# EAGLE board tivac-shield-power-board (EAGLE 7.1.0)
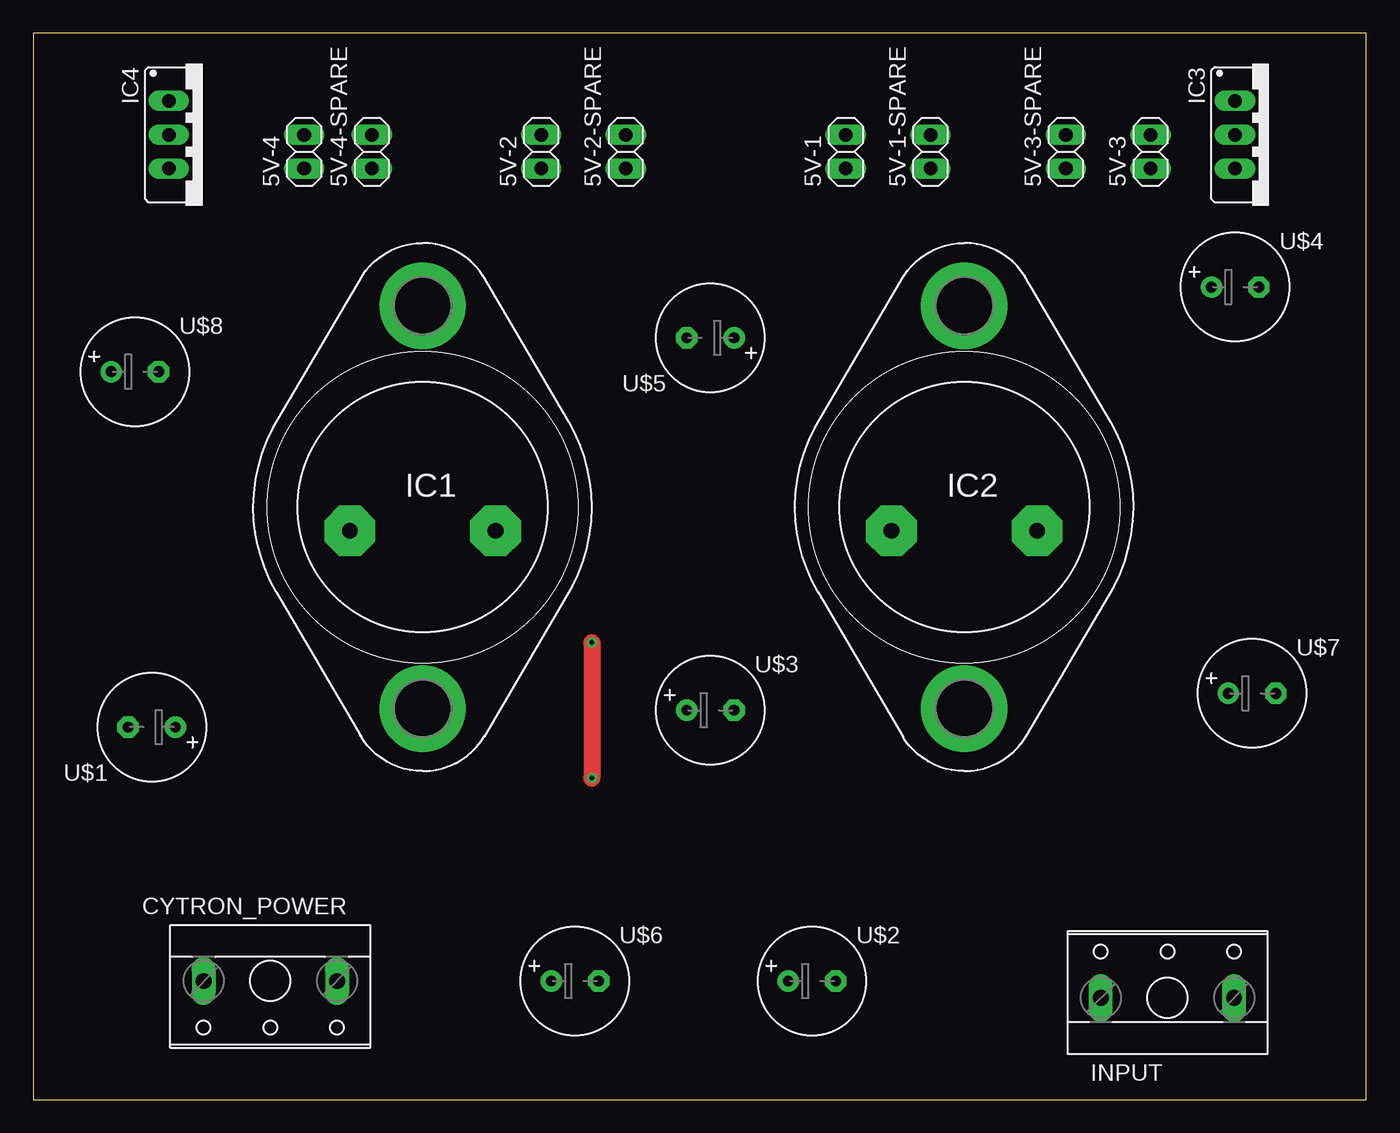
[diagram p0: board, top side]
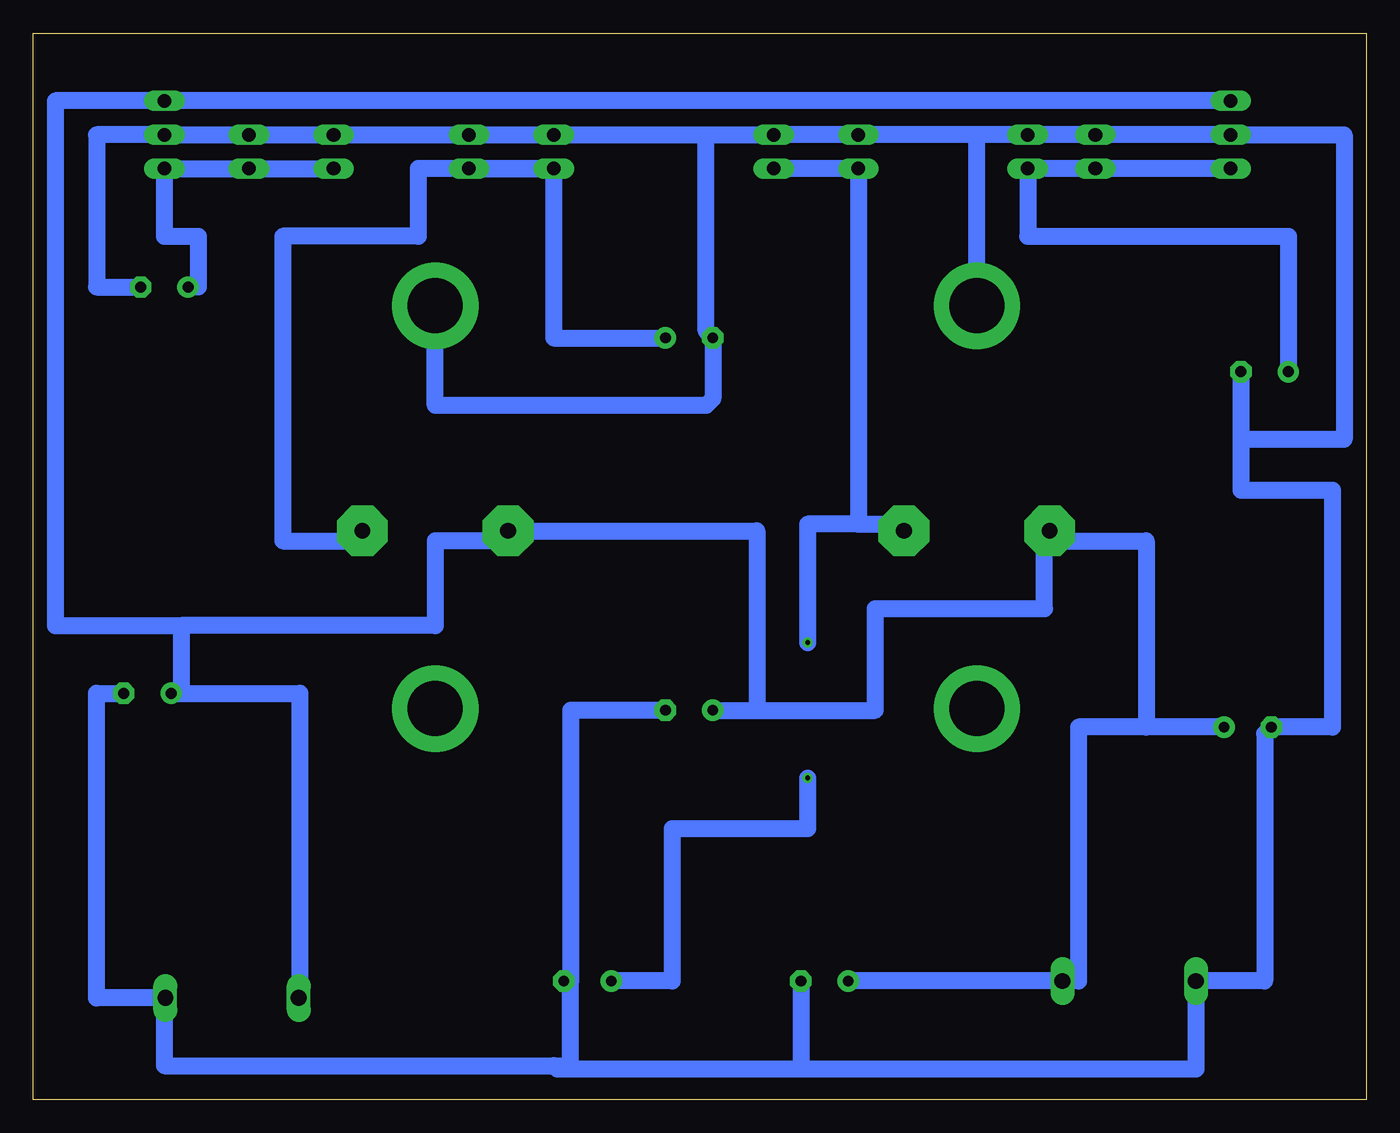
[diagram p1: board, bottom side, seen from below]

Size 100 x 80 mm. Coordinates in mm from the lower left corner, seen from the top.
Outline: 0,0 100,0 100,80 0,80 0,0
Copper layers (1*16): Top 0.035mm / dielectric 1.5mm / Bottom 0.035mm
Design rules "default": minimum track width 6mil, minimum drill 0.35mm, track to track 6mil, track to pad 6mil, pad to pad 6mil, via to via 6mil, smd to smd 6mil, copper to edge 40mil, drill to drill 6mil, minimum pad ring 10mil, minimum via ring 8mil, stop-mask expansion 4mil, vias tented up to drill 0mil, thermal gap 10mil

## Footprints (pad centres in the part's own frame; a part is rotated, then mirrored left to right if it is on the bottom)
1X02 = drill 1.016 long: 1 -1.27,0; 2 1.27,0
W237-113 = drill 1.194 long: 1 -5,-1.27; 2 5,-1.27
TO3-79 = drill 1.194 pad 3.81 octagon: 1 -1.778,-5.461; 3 -1.778,5.461 | drill 4.115 pad 6.477: 2 15.113,0; 3@ -15.113,0
78XXS = drill 1.016 long: GND 0,-2.54; IN -2.54,-2.54; OUT 2.54,-2.54
E3,5-8 = drill 0.813 pad 1.6: + -1.778,0 | drill 0.813 pad 1.6 octagon: - 1.778,0

## Placement (x,y rotation side)
5V-1  [1X02]  60.96,71.12 90 top
5V-1-SPARE  [1X02]  67.31,71.12 90 top
5V-2  [1X02]  38.1,71.12 90 top
5V-2-SPARE  [1X02]  44.45,71.12 90 top
5V-3  [1X02]  83.82,71.12 90 top
5V-3-SPARE  [1X02]  77.47,71.12 90 top
5V-4  [1X02]  20.32,71.12 90 top
5V-4-SPARE  [1X02]  25.4,71.12 90 top
CYTRON_POWER  [W237-113]  17.78,7.62 180 top
IC1  [TO3-79]  29.21,44.45 90 top
IC2  [TO3-79]  69.85,44.45 90 top
IC3  [78XXS]  92.71,72.39 270 top
IC4  [78XXS]  12.7,72.39 270 top
INPUT  [W237-113]  85.09,8.89 0 top
U$1  [E3,5-8]  8.89,27.94 180 top
U$2  [E3,5-8]  58.42,8.89 0 top
U$3  [E3,5-8]  50.8,29.21 0 top
U$4  [E3,5-8]  90.17,60.96 0 top
U$5  [E3,5-8]  50.8,57.15 180 top
U$6  [E3,5-8]  40.64,8.89 0 top
U$7  [E3,5-8]  91.44,30.48 0 top
U$8  [E3,5-8]  7.62,54.61 0 top

## Library data of the parts
5V-1 5V-1-SPARE 5V-2 5V-2-SPARE 5V-3 5V-3-SPARE 5V-4 5V-4-SPARE = pinhead
CYTRON_POWER INPUT = con-wago-500; OC_FARNELL: unknown; OC_NEWARK: unknown
IC1-IC4 U$1-U$8 = MIA_LIBRARY-2-2-2

## Nets
5V-1: 5V-1-SPARE.1 5V-1.1 IC2.1 U$5.+
5V-2: 5V-2-SPARE.1 5V-2.1 IC1.1 U$2.+
5V-3: 5V-3-SPARE.1 5V-3.1 IC3.OUT U$4.+
5V-4: 5V-4-SPARE.1 5V-4.1 IC4.OUT U$8.+
12V: CYTRON_POWER.1 IC1.3 IC2.3 IC3.IN IC4.IN INPUT.1 U$1.+ U$3.+ U$6.+ U$7.+
GND: 5V-1-SPARE.2 5V-1.2 5V-2-SPARE.2 5V-2.2 5V-3-SPARE.2 5V-3.2 5V-4-SPARE.2 5V-4.2 CYTRON_POWER.2 IC1.2 IC2.2 IC3.GND IC4.GND INPUT.2 U$1.- U$2.- U$3.- U$4.- U$5.- U$6.- U$7.- U$8.-

## Tracks (layer width: path | path; a pad name or v marks a point on that pad's centre or on a via)
5V-1
  Bottom 1.27: 5V-1-SPARE.1 5V-1.1 | 5V-1.1 71.12,69.85 71.12,64.77 81.28,64.77 81.28,41.91 74.93,41.91 74.93,42.29 IC2.1 | 5V-1.1 60.96,57.15 U$5.+
5V-2  (via drill 0.35)
  Top 1.27: v41.91,34.29 v41.91,24.13
  Bottom 1.27: 5V-2-SPARE.1 5V-2.1 38.1,43.18 | 38.1,43.18 36.83,43.18 34.29,43.18 34.29,43.05 IC1.1 | 38.1,43.18 41.91,43.18 v41.91,34.29 | v41.91,24.13 41.91,20.32 52.07,20.32 52.07,8.89 U$2.+
5V-3
  Bottom 1.27: U$4.+ 87.63,60.96 87.63,64.77 90.17,64.77 IC3.OUT 5V-3.1 5V-3-SPARE.1
5V-4
  Bottom 1.27: IC4.OUT 5V-4.1 5V-4-SPARE.1 25.4,64.77 5.84,64.77 U$8.+
12V
  Bottom 1.27: U$6.+ CYTRON_POWER.1 21.59,8.89 21.59,27.94 16.51,27.94 | U$1.+ 16.51,27.94 | 16.51,27.94 16.51,41.91 22.99,41.91 IC1.3 23.24,43.18 22.86,43.18 24.13,41.91 24.13,36.83 36.83,36.83 36.83,29.21 45.72,29.21 | U$3.+ 45.72,29.21 | 45.72,29.21 45.72,42.67 IC2.3 64.39,41.91 69.85,41.91 69.85,35.56 88.9,35.56 | 88.9,35.56 88.9,30.48 U$7.+ 80.01,30.48 80.01,7.62 INPUT.1 | IC4.IN IC3.IN 98.35,74.93 98.35,35.56 88.9,35.56
GND
  Bottom 1.27: U$4.- 95.25,60.96 95.25,72.39 IC3.GND 5V-3.2 5V-3-SPARE.2 5V-1-SPARE.2 5V-1.2 49.53,72.39 | 5V-2-SPARE.2 5V-2.2 29.21,72.39 | 45.72,72.39 5V-2-SPARE.2 | 49.53,72.39 5V-2-SPARE.2 | 29.21,72.39 5V-4-SPARE.2 5V-4.2 IC4.GND 1.65,72.39 1.65,49.53 9.4,49.53 | IC1.2 29.21,72.39 | 49.53,72.39 49.53,57.66 U$5.- 49.02,52.58 49.53,52.07 69.85,52.07 IC2.2 | U$7.- 95.25,30.48 95.25,7.62 INPUT.2 90.17,7.54 90.17,2.54 60.96,2.54 | 60.96,2.54 59.69,2.54 59.69,8.89 | 59.69,8.89 U$2.- | U$6.- 42.42,2.54 42.67,2.29 | 42.67,2.29 60.71,2.29 60.96,2.54 | U$8.- 9.4,49.53 | 9.4,49.53 9.4,45.72 2.54,45.72 2.54,27.94 U$1.- 7.62,27.43 7.62,8.89 CYTRON_POWER.2 12.78,2.29 42.67,2.29 | U$3.- 59.69,29.21 59.69,8.89